# Altium PCB demo_dermis_main_testboard.PcbDoc (part 5 of 7)
Units mm, origin at the board's own origin, x right, y up, seen from the top; angles counter-clockwise.
Board outline 348.67 x 252.79 mm, 4 copper layers (Top Layer, Layer 1, Layer 2, Bottom Layer), stack 0.603 mm thick; 389 components, 231 nets, 2086 pads, 2626 vias.
Unrouted connection lines stored in the file: 34.
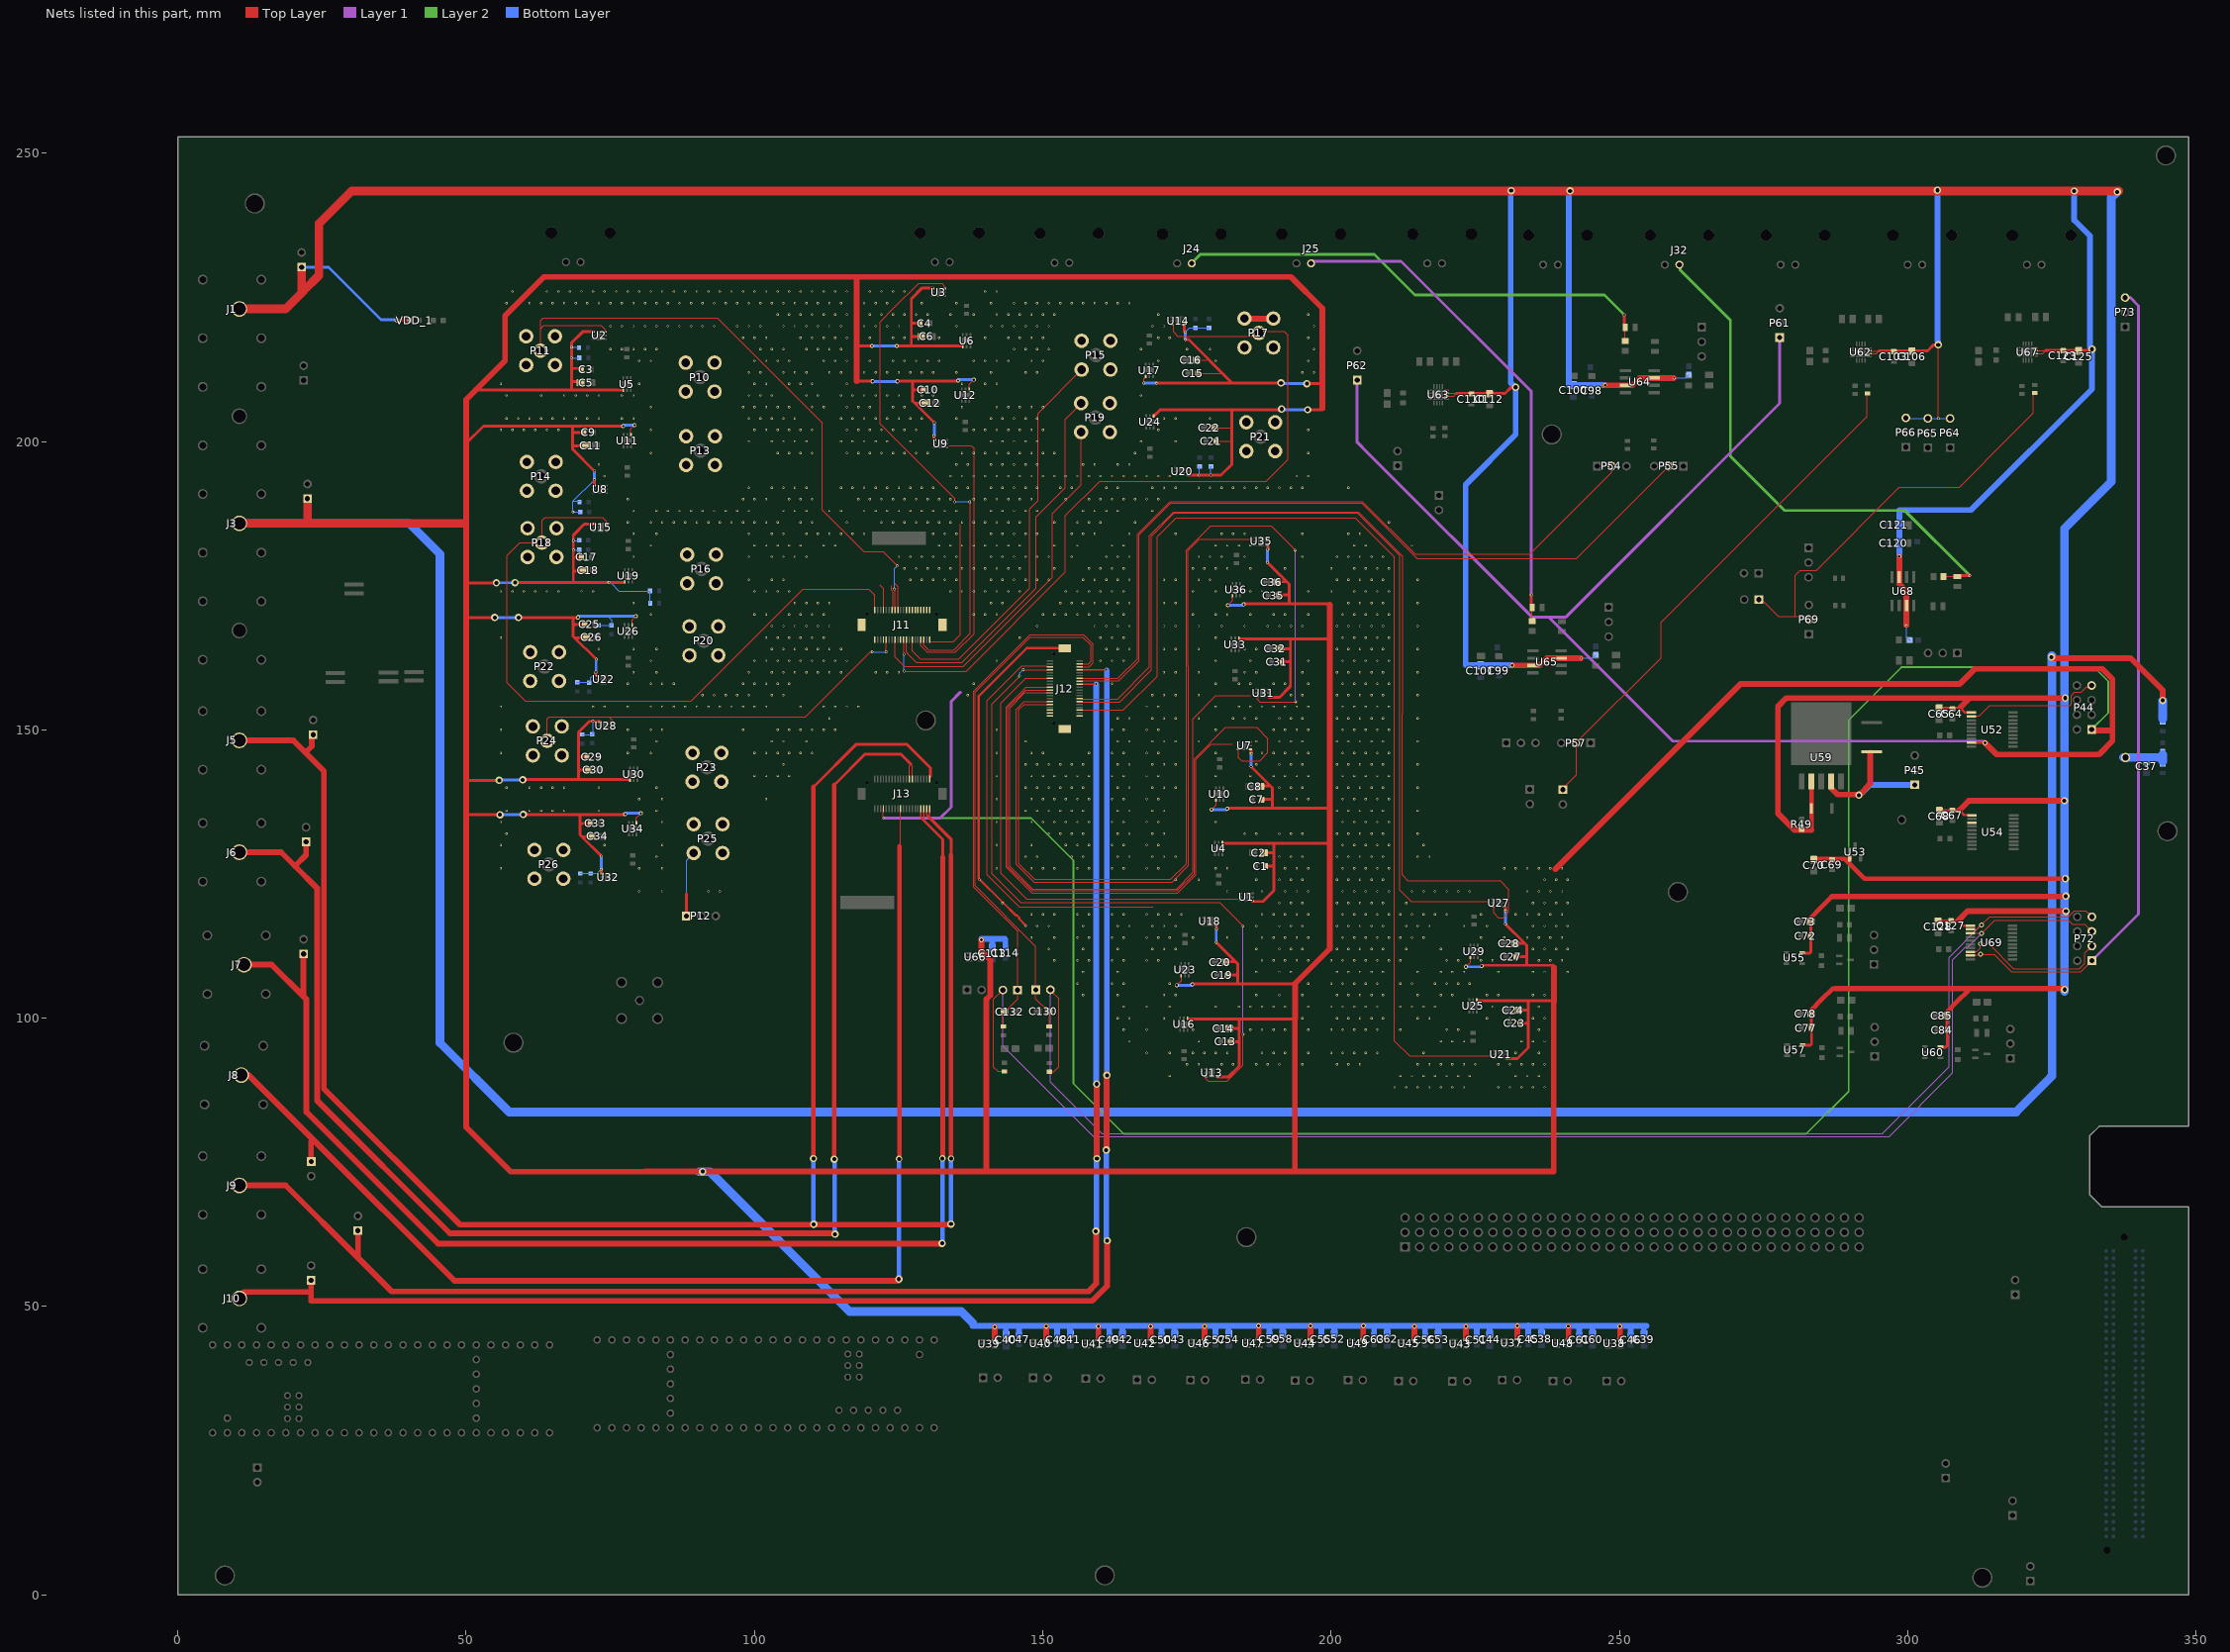
[diagram p6: the nets of this part, all layers, seen from the top]

## Via types
v1: diameter 0.4, hole 0.25, Top Layer to Bottom Layer, 1673 vias
v2: diameter 0.85, hole 0.5, Top Layer to Bottom Layer, 416 vias
v3: diameter 0.5, hole 0.3, Top Layer to Bottom Layer, 391 vias
v4: diameter 1.27, hole 0.711, Top Layer to Bottom Layer, 85 vias
v5: diameter 0.7, hole 0.4, Top Layer to Bottom Layer, 57 vias
v6: diameter 1.1, hole 0.7, Top Layer to Bottom Layer, 4 vias

## Nets (pads, with @x,y where several pads share a name; then routed paths per layer and width w, separated by ;. In a path a pad name is that pad's centre, name@x,y a point inside that pad or via, vN(x,y) a via of type N, cw(c..) or ccw(c..) an arc to the next point about the centre after c; other vN are vias at no path point) (continued)
VCM: J11.1 J11.2 J11.3 J11.5 J11.7 J11.8 J11.9 J11.11 J11.13 J11.14 J11.15 J11.17 J11.18 J11.22 J11.23 J11.26 J11.27 J11.33 J11.34 J11.40 J11.S1 J11.S2 J12.5 J12.13 J12.19 J12.23 J12.29 J12.30 J12.35 J12.36 J12.37 J12.39 J12.40 J12.S1 J12.S2 J13.34 P10.2 P11.2 P12.1 P13.2 P14.2 P15.2 P16.2 P17.2 P18.2 P19.2 P20.2 P21.2 P22.2 P23.2 P24.2 P25.2 P26.2 P44.1 P61.1 P62.1 U52.9 | length 1949.2
  Top Layer w0.1: 88.193,121.535 88.244,121.586
  Top Layer w0.15: 121.667,175.137 122.359,174.445 122.359,170.812 J11.33@122.346,170.799 ; 123.744,175.028 123.722,175.005 123.722,174.189 123.998,173.912 123.998,173.41 123.997,173.408 123.997,170.95 J11.27@123.846,170.799 ; 124.294,175.438 124.876,174.855 124.876,170.829 J11.23@124.846,170.799 ; J11.26@124.346,165.649 124.346,162.609 125.819,161.135 125.921,161.135 126.012,161.045 126.199,161.045 ; 126.2,161.044 136.244,161.044 151.63,176.43 151.63,187.504 156.63,192.504 P19.2@156.63,201.636 ; 140.315,124.873 140.315,155.088 146.291,161.065 150.7,161.065 J12.5@150.852,160.912 ; 140.324,124.873 145.926,119.271 169.085,119.271 ; J12.23@150.98,156.419 146.877,156.419 144.266,153.808 144.266,126.343 148.188,122.421 173.164,122.421 176.02,125.277 176.02,151.91 180.011,155.901 185.941,155.901 ; J12.29@151.205,154.914 146.745,154.914 145.398,153.568 145.398,126.682 148.463,123.617 172.41,123.617 175.196,126.403 175.196,161.105 175.196,181.049 177.166,183.018 186.428,183.018 ; J12.19@151.21,157.408 147.084,157.408 143.683,154.006 143.683,126.187 148.171,121.698 173.337,121.698 176.531,124.893 176.531,144.888 179.2,147.556 182.788,147.556 ; J12.13@151.411,158.92 147.033,158.92 142.769,154.657 142.769,125.133 147.205,120.697 183.836,120.697 ; J12.30@155.981,154.858 163.291,154.858 168.835,160.402 168.835,183.606 172.794,187.565 204.547,187.565 211.894,180.218 211.894,122.244 213.894,120.244 227.284,120.244 ; J12.36@156.647,153.458 163.962,153.458 169.815,159.311 169.815,183.455 173.121,186.76 204.172,186.76 210.983,179.949 210.983,96.043 213.581,93.445 227.947,93.445
  Top Layer w0.2: v1@122.335,134.657 122.335,136.247 J13.34@122.345,136.33 ; J11.18@126.345,165.649 126.345,163.489 126.52,163.314 126.52,163.208 128.058,161.67 135.949,161.67 148.836,174.556 148.836,186.919 153.896,191.978 153.896,203.811 156.63,206.545 P19.2@156.63,206.635 ; J11.14@127.346,165.649 127.345,163.69 128.716,162.32 129.411,162.32 129.419,162.311 135.454,162.311 147.71,174.567 147.71,188.292 149.128,189.711 149.128,196 149.128,204.873 P15.2@156.719,212.464 ; J11.8@128.845,165.649 128.845,164.579 129.957,163.468 134.866,163.468 138.108,166.71 138.108,198.755 137.596,199.267 133.748,199.267 133.723,199.293 ; J11.2@130.341,165.644 J11.2@130.346,165.649 ; J11.2@130.39,165.288 134.492,165.288 135.695,166.491 135.695,185.622
  Top Layer w0.4: v1@146.997,116.123 145.899,117.222 145.899,117.418 145.459,117.857 145.263,117.857 143.06,120.06 138.873,124.247 138.873,155.827 147.21,164.165 J12.S1@153.78,164.165 ; U52.9@311.36,147.791 v2@313.337,147.791
  Top Layer w0.5: P12.1@88.193,117.712 88.193,121.535
  Top Layer w1: P17.2@184.971,221.313 P17.2@189.971,221.313 ; 238.865,125.808 271.034,157.978 309.029,157.978 311.627,160.576 333.727,160.576 335.49,158.813 335.49,149.883 ; v2@313.337,147.791 315.391,145.737 333.145,145.737 335.49,148.081 335.49,149.883 ; P44.1@331.856,150.075 332.048,149.883 335.49,149.883
  Layer 1 w0.5: v1@122.463,134.691 132.183,134.691 134.094,136.602 134.094,154.914 135.705,156.524 ; P62.1@204.503,210.654 204.503,199.879 206.511,197.872 206.511,197.861 234.796,169.576 240.725,169.576 277.78,206.63 P61.1@277.78,218.025 ; 237.725,169.538 259.213,148.05 313.073,148.05 v2(313.376,147.747)
  Layer 2 w0.3: v1@122.333,134.706 147.955,134.706 154.83,127.83 155.293,127.368 155.293,88.675 164.021,79.947 282.363,79.947 289.719,87.303 289.719,151.696 298.896,160.874 332.313,160.874 334.748,158.439 334.748,152.967 P44.1@331.856,150.075
  Bottom Layer w0.15: P12.1@88.193,117.712 88.193,127.373 P25.2@89.456,128.636
  other v1: 211,88 213,88 215,88 217,88 219,88 221,88 223,88 229,88 231,88 233,88 235,88 237,88 172,90 212,90 214,90 216,90 218,90 220,90 222,90 224,90 232,90 234,90 236,90 175,92 177,92 181,92 183,92 187,92 189,92 191,92 195,92 201,92 203,92 205,92 215,92 217,92 219,92 221,92 223,92 225,92 229,92 231,92 233,92 235,92 237,92 168,94 172,94 176,94 178,94 180,94 182,94 188,94 190,94 192,94 196,94 200,94 202,94 204,94 206,94 208,94 216,94 232,94 236,94 165,96 177,96 219,96 221,96 223,96 233,96 235,96 237,96 164,98 168,98 176,98 186,98 188,98 190,98 192,98 196,98 200,98 202,98 204,98 206,98 208,98 212,98 220,98 222,98 236,98 163,100 165,100 171,100 195,100 201,100 203,100 205,100 207,100 209,100 215,100 217,100 227,100 231,100 235,100 237,100 164,102 168,102 172,102 180,102 184,102 186,102 188,102 190,102 192,102 196,102 200,102 202,102 204,102 206,102 208,102 212,102 214,102 216,102 218,102 228,102 236,102 157,104 163,104 171,104 173,104 187,104 191,104 195,104 201,104 203,104 205,104 207,104 209,104 215,104 219,104 221,104 227,104 229,104 235,104 237,104 156,106 162,106 164,106 172,106 196,106 200,106 202,106 204,106 206,106 208,106 212,106 214,106 218,106 220,106 222,106 224,106 157,108 163,108 173,108 187,108 191,108 193,108 201,108 203,108 205,108 207,108 209,108 215,108 219,108 221,108 223,108 229,108 235,108 237,108 241,108 152,110 156,110 158,110 162,110 164,110 168,110 170,110 188,110 190,110 192,110 194,110 196,110 200,110 202,110 204,110 206,110 208,110 210,110 212,110 220,110 222,110 226,110 228,110 236,110 238,110 240,110 151,112 157,112 163,112 169,112 171,112 173,112 187,112 191,112 193,112 195,112 201,112 203,112 205,112 207,112 209,112 213,112 219,112 223,112 235,112 237,112 239,112 241,112 148,114 152,114 156,114 158,114 162,114 164,114 168,114 170,114 172,114 176,114 182,114 188,114 190,114 192,114 194,114 196,114 202,114 204,114 206,114 208,114 210,114 212,114 214,114 216,114 226,114 230,114 234,114 236,114 238,114 240,114 147,116 149,116 151,116 157,116 163,116 165,116 169,116 171,116 173,116 187,116 191,116 193,116 195,116 201,116 203,116 205,116 207,116 209,116 213,116 215,116 217,116 223,116 227,116 235,116 237,116 239,116 241,116 148,118 150,118 152,118 156,118 158,118 162,118 164,118 168,118 170,118 172,118 174,118 188,118 190,118 192,118 194,118 196,118 202,118 204,118 206,118 208,118 210,118 212,118 214,118 216,118 218,118 220,118 226,118 232,118 234,118 236,118 238,118 240,118 143,120 191,120 193,120 195,120 201,120 203,120 205,120 207,120 209,120 213,120 235,120 237,120 239,120 241,120 80,122 84,122 92,122 94,122 182,122 188,122 192,122 194,122 196,122 202,122 204,122 206,122 208,122 210,122 214,122 216,122 218,122 220,122 222,122 224,122 234,122 236,122 238,122 240,122 139,124 173,124 177,124 187,124 191,124 193,124 195,124 201,124 203,124 205,124 207,124 209,124 237,124 239,124 241,124 56,126 80,126 84,126 142,126 148,126 150,126 152,126 156,126 158,126 162,126 164,126 168,126 170,126 180,126 182,126 192,126 194,126 196,126 202,126 204,126 206,126 208,126 210,126 230,126 232,126 234,126 236,126 238,126 240,126 83,128 147,128 149,128 155,128 157,128 163,128 165,128 169,128 171,128 173,128 191,128 193,128 195,128 201,128 203,128 205,128 207,128 209,128 215,128 217,128 56,130 74,130 84,130 142,130 148,130 154,130 156,130 158,130 162,130 164,130 168,130 170,130 202,130 204,130 206,130 208,130 210,130 216,130 57,132 151,132 153,132 155,132 157,132 163,132 165,132 169,132 171,132 185,132 187,132 191,132 193,132 195,132 201,132 203,132 205,132 207,132 209,132 215,132 56,134 84,134 142,134 148,134 150,134 152,134 154,134 156,134 158,134 162,134 164,134 168,134 170,134 180,134 202,134 204,134 206,134 208,134 210,134 122.333,134.657 57,136 61,136 63,136 65,136 67,136 73,136 83,136 147,136 149,136 151,136 153,136 155,136 157,136 163,136 165,136 169,136 171,136 201,136 203,136 205,136 207,136 209,136 215,136 80,138 84,138 102,138 142,138 148,138 150,138 152,138 154,138 156,138 158,138 162,138 164,138 168,138 170,138 192,138 194,138 196,138 202,138 204,138 206,138 208,138 210,138 57,140 61,140 63,140 65,140 67,140 73,140 83,140 147,140 149,140 151,140 153,140 155,140 157,140 163,140 165,140 169,140 171,140 173,140 191,140 193,140 195,140 201,140 203,140 205,140 207,140 209,140 215,140 100,142 102,142 104,142 106,142 142,142 148,142 150,142 152,142 154,142 156,142 158,142 162,142 164,142 168,142 170,142 180,142 186,142 190,142 192,142 194,142 196,142 202,142 204,142 206,142 208,142 210,142 105,144 147,144 149,144 151,144 153,144 155,144 157,144 163,144 165,144 169,144 171,144 173,144 187,144 191,144 193,144 195,144 201,144 203,144 205,144 207,144 209,144 215,144 56,146 78,146 82,146 100,146 102,146 104,146 106,146 108,146 110,146 142,146 148,146 150,146 158,146 162,146 164,146 168,146 170,146 180,146 188,146 190,146 192,146 194,146 196,146 202,146 204,146 206,146 208,146 210,146 83,148 103,148 105,148 109,148 147,148 163,148 165,148 169,148 171,148 173,148 177,148 187,148 191,148 193,148 195,148 201,148 203,148 205,148 207,148 209,148 215,148 56,150 78,150 82,150 84,150 98,150 104,150 106,150 108,150 110,150 112,150 114,150 142,150 162,150 164,150 168,150 170,150 180,150 190,150 192,150 194,150 196,150 202,150 204,150 206,150 208,150 210,150 113,152 163,152 165,152 169,152 171,152 173,152 177,152 183,152 185,152 187,152 191,152 193,152 195,152 201,152 203,152 205,152 207,152 209,152 215,152 56,154 72,154 74,154 78,154 82,154 84,154 86,154 88,154 90,154 92,154 94,154 96,154 98,154 100,154 102,154 108,154 112,154 114,154 116,154 118,154 168,154 170,154 180,154 184,154 186,154 188,154 190,154 192,154 194,154 196,154 202,154 204,154 206,154 208,154 210,154 91,156 93,156 95,156 97,156 99,156 103,156 105,156 137,156 169,156 171,156 173,156 177,156 193,156 195,156 201,156 203,156 205,156 207,156 209,156 215,156 78,158 82,158 84,158 86,158 98,158 100,158 102,158 104,158 106,158 138,158 162,158 180,158 184,158 186,158 190,158 192,158 196,158 202,158 204,158 206,158 208,158 210,158 79,160 83,160 99,160 103,160 105,160 107,160 109,160 111,160 113,160 115,160 121,160 123,160 125,160 171,160 173,160 177,160 185,160 187,160 195,160 201,160 203,160 205,160 207,160 209,160 215,160 82,162 100,162 102,162 104,162 106,162 108,162 110,162 112,162 114,162 116,162 142,162 160,162 162,162 164,162 180,162 186,162 196,162 202,162 204,162 206,162 208,162 210,162 73,164 79,164 83,164 103,164 105,164 107,164 109,164 111,164 113,164 115,164 161,164 163,164 165,164 171,164 173,164 177,164 185,164 187,164 201,164 203,164 205,164 207,164 209,164 215,164 56,166 102,166 104,166 106,166 108,166 110,166 112,166 146,166 160,166 162,166 164,166 180,166 202,166 204,166 206,166 208,166 210,166 103,168 105,168 107,168 109,168 111,168 113,168 149,168 159,168 161,168 163,168 165,168 171,168 173,168 177,168 181,168 185,168 189,168 191,168 193,168 195,168 201,168 203,168 205,168 207,168 209,168 215,168 82,170 100,170 102,170 106,170 108,170 110,170 112,170 138,170 140,170 142,170 150,170 152,170 154,170 156,170 158,170 160,170 162,170 164,170 176,170 180,170 182,170 186,170 190,170 192,170 196,170 202,170 204,170 206,170 208,170 210,170 79,172 107,172 109,172 111,172 113,172 141,172 143,172 153,172 155,172 157,172 159,172 161,172 163,172 165,172 171,172 173,172 203,172 205,172 207,172 209,172 215,172 56,174 58,174 60,174 62,174 64,174 66,174 70,174 72,174 100,174 102,174 104,174 106,174 134,174 136,174 138,174 140,174 142,174 144,174 146,174 154,174 156,174 158,174 160,174 162,174 164,174 176,174 180,174 186,174 188,174 196,174 200,174 204,174 206,174 208,174 210,174 99,176 103,176 105,176 127,176 129,176 131,176 133,176 135,176 141,176 143,176 145,176 147,176 149,176 151,176 157,176 159,176 161,176 163,176 165,176 171,176 173,176 177,176 179,176 201,176 203,176 205,176 207,176 209,176 215,176 126,178 128,178 130,178 132,178 134,178 136,178 138,178 140,178 142,178 144,178 146,178 152,178 158,178 160,178 162,178 164,178 176,178 178,178 180,178 182,178 186,178 192,178 200,178 204,178 206,178 208,178 210,178 79,180 99,180 103,180 105,180 107,180 109,180 125,180 127,180 129,180 131,180 133,180 135,180 141,180 143,180 145,180 147,180 149,180 151,180 155,180 161,180 163,180 165,180 177,180 179,180 181,180 185,180 195,180 201,180 203,180 205,180 207,180 209,180 82,182 100,182 102,182 104,182 106,182 108,182 112,182 114,182 132,182 134,182 136,182 138,182 140,182 142,182 144,182 146,182 152,182 156,182 162,182 164,182 180,182 182,182 184,182 186,182 204,182 206,182 214,182 79,184 83,184 99,184 103,184 105,184 109,184 111,184 113,184 115,184 117,184 119,184 131,184 133,184 135,184 141,184 143,184 145,184 147,184 149,184 155,184 157,184 159,184 165,184 173,184 181,184 183,184 185,184 195,184 203,184 205,184 78,186 82,186 84,186 86,186 88,186 90,186 92,186 94,186 96,186 98,186 100,186 102,186 104,186 108,186 110,186 116,186 122,186 124,186 126,186 128,186 130,186 132,186 134,186 136,186 138,186 140,186 142,186 144,186 146,186 152,186 156,186 158,186 160,186 166,186 210,186 79,188 83,188 85,188 87,188 89,188 91,188 93,188 95,188 97,188 99,188 105,188 107,188 109,188 113,188 115,188 119,188 121,188 123,188 125,188 127,188 129,188 131,188 133,188 135,188 141,188 143,188 145,188 147,188 149,188 157,188 159,188 161,188 163,188 169,188 78,190 98,190 100,190 102,190 106,190 108,190 110,190 118,190 120,190 122,190 124,190 126,190 128,190 130,190 132,190 134,190 138,190 140,190 142,190 144,190 146,190 148,190 154,190 158,190 160,190 162,190 164,190 166,190 168,190 170,190 99,192 103,192 105,192 107,192 109,192 115,192 117,192 119,192 121,192 123,192 125,192 127,192 129,192 131,192 135,192 137,192 141,192 143,192 145,192 147,192 149,192 153,192 155,192 161,192 163,192 169,192 171,192 173,192 177,192 179,192 181,192 183,192 185,192 187,192 189,192 191,192 193,192 195,192 203,192 74,194 134,194 136,194 138,194 140,194 142,194 144,194 146,194 148,194 150,194 152,194 154,194 156,194 158,194 160,194 162,194 164,194 166,194 168,194 170,194 172,194 194,194 196,194 73,196 135,196 137,196 141,196 143,196 145,196 147,196 149,196 157,196 159,196 163,196 165,196 82,198 104,198 106,198 108,198 110,198 116,198 118,198 120,198 122,198 124,198 126,198 128,198 130,198 136,198 138,198 140,198 142,198 144,198 146,198 148,198 150,198 152,198 166,198 196,198 99,200 103,200 105,200 107,200 109,200 115,200 117,200 119,200 121,200 123,200 127,200 141,200 143,200 145,200 147,200 149,200 167,200 173,200 56,202 58,202 60,202 62,202 64,202 66,202 82,202 100,202 102,202 104,202 106,202 108,202 110,202 116,202 118,202 120,202 122,202 124,202 126,202 128,202 138,202 140,202 142,202 144,202 146,202 148,202 150,202 170,202 196,202 57,204 59,204 61,204 63,204 65,204 67,204 69,204 71,204 73,204 77,204 79,204 99,204 101,204 103,204 105,204 107,204 115,204 117,204 119,204 121,204 123,204 125,204 127,204 129,204 135,204 141,204 143,204 145,204 147,204 149,204 171,204 173,204 179,204 82,206 98,206 100,206 102,206 104,206 106,206 110,206 112,206 116,206 118,206 120,206 124,206 126,206 136,206 142,206 144,206 146,206 148,206 150,206 57,208 63,208 67,208 69,208 71,208 73,208 77,208 79,208 99,208 101,208 103,208 109,208 111,208 115,208 117,208 119,208 121,208 123,208 125,208 129,208 131,208 167,208 56,210 80,210 100,210 102,210 106,210 108,210 110,210 116,210 136,210 140,210 142,210 99,212 101,212 105,212 107,212 109,212 113,212 115,212 119,212 121,212 123,212 125,212 127,212 129,212 131,212 135,212 141,212 147,212 149,212 195,212 197,212 80,214 82,214 100,214 102,214 104,214 106,214 112,214 114,214 116,214 120,214 124,214 126,214 128,214 130,214 132,214 138,214 140,214 142,214 144,214 148,214 150,214 170,214 180,214 196,214 75,216 77,216 79,216 81,216 83,216 101,216 103,216 105,216 109,216 111,216 113,216 115,216 145,216 147,216 149,216 151,216 167,216 175,216 179,216 197,216 98,218 100,218 102,218 108,218 110,218 112,218 114,218 116,218 120,218 124,218 126,218 132,218 140,218 144,218 146,218 148,218 150,218 170,218 172,218 196,218 75,220 77,220 79,220 81,220 83,220 85,220 87,220 89,220 91,220 93,220 97,220 99,220 101,220 105,220 107,220 109,220 111,220 113,220 115,220 119,220 121,220 123,220 125,220 135,220 141,220 143,220 145,220 147,220 149,220 151,220 169,220 171,220 197,220 104,222 106,222 108,222 110,222 112,222 114,222 116,222 120,222 122,222 124,222 126,222 128,222 130,222 134,222 138,222 142,222 144,222 146,222 148,222 150,222 152,222 170,222 196,222 57,224 61,224 63,224 65,224 67,224 69,224 71,224 73,224 75,224 77,224 79,224 81,224 83,224 85,224 87,224 89,224 91,224 93,224 95,224 97,224 99,224 101,224 103,224 105,224 107,224 109,224 111,224 113,224 115,224 119,224 121,224 123,224 129,224 135,224 141,224 145,224 147,224 149,224 151,224 153,224 155,224 157,224 159,224 161,224 163,224 165,224 58,226 64,226 66,226 68,226 70,226 72,226 74,226 76,226 78,226 80,226 82,226 84,226 86,226 88,226 90,226 92,226 94,226 96,226 98,226 100,226 102,226 104,226 106,226 108,226 110,226 112,226 114,226 116,226 120,226 122,226 124,226 126,226 140,226 142,226
VCM_COMP: U54.3 | length 0.1
  Top Layer w0.15: U54.3@311.094,133.901 U54.3@311.152,133.958
VCM_INAMP: P72.1 P73.3 U69.9 | length 143.1
  Top Layer w0.2: U69.9@310.879,110.847 310.994,110.963 312.496,110.963 v2(312.619,111.086) 314.977,111.086 317.999,108.064 330.005,108.064 P72.1@331.907,109.966
  Layer 1 w0.5: P72.1@331.907,109.966 340.006,118.065 340.006,223.537 338.59,224.954 P73.3@337.679,224.954
  Bottom Layer w1: P72.1@331.907,109.966 P72.1@331.958,109.916
VDAC_RESERVED0: P44.7 U52.2 | length 23.7
  Top Layer w0.2: U52.2@311.278,152.385 312.364,152.385 314.184,154.205 328.062,154.205 328.316,154.459 328.316,155.966 328.877,156.528 330.074,156.528 331.028,157.482 331.643,157.482 P44.7@331.856,157.695
VDAC_RESERVED1: P72.3 U69.8 | length 26.5
  Top Layer w0.2: U69.8@310.879,111.497 310.99,111.609 311.999,111.609 312.584,112.194 v2(312.584,112.901) 314.005,112.901 318.356,108.55 329.734,108.55 330.69,109.506 330.69,111.288 P72.3@331.907,112.506
VDD_2P5V: C83.1 P45.1 U59.4 | length 25.4
  Top Layer w0.2: U59.4@286.531,140.273 U59.4@286.531,141.851
  Top Layer w1: U59.4@286.726,139.858 287.781,138.803 291.505,138.745 291.751,138.741 293.465,140.675 C83.1@293.465,146.069
  Bottom Layer w1: v4@291.568,138.609 293.428,140.47 P45.1@301.195,140.47
  other v4: 291.504,138.673
VDD_3P3V_IN: C1.1 C2.1 C3.1 C4.1 C5.1 C6.1 C7.1 C8.1 C9.1 C10.1 C11.1 C12.1 C13.1 C14.1 C15.1 C16.1 C17.1 C18.1 C19.1 C20.1 C21.1 C22.1 C23.1 C24.1 C25.1 C26.1 C27.1 C28.1 C29.1 C30.1 C31.1 C32.1 C33.1 C34.1 C35.1 C36.1 C38.1 C39.1 C40.1 C41.1 C42.1 C43.1 C44.1 C45.1 C46.1 C47.1 C48.1 C49.1 C50.1 C51.1 C52.1 C53.1 C54.1 C55.1 C56.1 C57.1 C58.1 C59.1 C60.1 C61.1 C62.1 C63.1 C113.1 C114.1 J3.1 P3.1 R24.1 R25.1 R26.1 R27.1 R28.2 R29.1 R30.1 R31.1 R32.1 R35.1 R36.1 R37.1 R38.1 R39.1 R40.1 R41.1 R42.1 R43.1 R44.1 R45.1 R46.1 U1.4 U2.4 U3.4 U4.4 U5.4 U6.4 U7.4 U8.4 U9.4 U10.4 U11.4 U12.4 U13.4 U14.4 U15.4 U16.4 U17.4 U18.4 U19.4 U20.4 U21.4 U22.4 U23.4 U24.4 U25.4 U26.4 U27.4 U28.4 U29.4 U30.4 U31.4 U32.4 U33.4 U34.4 U35.4 U36.4 U37.5@232.354,44.312 U38.5@250.13,44.222 U39.5@141.672,44.181 U40.5@150.628,44.248 U41.5@159.681,44.194 U42.5@168.741,44.243 U43.5@223.39,44.203 U44.5@196.444,44.283 U45.5@214.461,44.232 U46.5@178.11,44.243 U47.5@187.483,44.288 U48.5@241.201,44.251 U49.5@205.614,44.293 U66.5@139.318,111.267 | length 2267
  Top Layer w0.1: 193.717,99.874 193.717,99.928 193.729,99.939 ; 193.729,105.889 193.74,105.9
  Top Layer w0.15: 68.299,210.392 68.318,210.373 ; 68.63,199.243 68.649,199.224 ; C16.1@176.655,214.099 176.687,214.132 178.677,214.132 ; C15.1@176.884,211.804 180.969,211.804 ; C22.1@179.792,202.337 179.824,202.37 182.799,202.37 ; C21.1@180.021,200.042 182.783,200.042 182.799,200.024
  Top Layer w0.2: U8.4@72.134,192.454 U8.4@72.22,192.368 ; U11.4@78.571,201.152 78.571,202.188 v5(79.217,202.833) ; U26.4@78.76,168.034 78.76,169.07 v5(79.405,169.715) ; U34.4@79.501,134.009 79.501,134.723 v5(80.307,135.529) ; U12.4@137.216,209.184 137.216,209.897 v5(138.022,210.703) ; v3(167.532,210.123) 167.532,210.876 167.819,211.163 U17.4@167.819,211.316 ; v5(173.207,105.724) 174.013,106.53 U23.4@174.013,107.243 ; v5(179.244,136.183) 180.05,136.989 U10.4@180.05,137.702 ; v5(182.105,171.597) 182.911,172.403 U36.4@182.911,173.116 ; v5(223.345,108.909) 224.151,109.715 U29.4@224.151,110.428
  Top Layer w0.5: 49.989,135.282 v4(55.856,135.283) ; 49.989,141.241 v4(55.743,141.242) ; 49.989,169.466 49.992,169.468 v4(54.952,169.47) ; 49.989,199.69 52.985,202.686 68.483,202.686 ; 50.294,175.49 v4(55.236,175.49) ; 51.656,208.934 68.299,208.934 ; v4(58.477,175.53) 58.511,175.564 68.58,175.564 ; v4(59.073,169.468) v5@69.407,169.468 ; v4@59.485,141.378 69.483,141.378 ; v4@59.976,135.282 v5@77.517,135.282 ; 68.318,210.373 C5.1@69.88,210.373 ; 68.394,212.668 C3.1@69.65,212.668 ; 68.563,169.27 68.563,166.219 v3(72.55,162.231) ; 68.632,179.817 C17.1@70.112,179.817 ; 68.649,199.224 C11.1@70.211,199.224 ; 68.692,168.242 C25.1@70.181,168.242 ; 68.725,201.519 C9.1@69.982,201.519 ; 68.779,177.521 C18.1@70.341,177.521 ; 68.849,165.946 C26.1@70.41,165.946 ; 69.626,143.044 C30.1@71.188,143.044 ; 69.702,145.339 C29.1@70.959,145.339 ; 69.717,135.146 69.717,131.834 70.105,131.446 ; 69.757,133.742 C33.1@71.195,133.742 ; C34.1@71.424,131.446 70.105,131.446 ; U2.4@72.034,219.027 70.198,219.027 68.299,217.128 68.299,216.362 68.299,210.392 68.299,208.934 ; U8.4@72.134,192.454 72.223,192.542 v3(72.223,193.372) ; v3@72.235,194.863 68.483,198.614 68.483,202.686 ; U15.4@72.283,185.749 72.315,185.657 70.479,185.657 68.58,183.758 v3(68.58,182.833) 68.58,175.564 ; U22.4@72.504,159.497 v3(72.504,160.002) ; U28.4@73.21,151.37 73.218,151.471 71.382,151.471 69.483,149.572 69.483,141.378 ; U32.4@73.407,125.213 v3(73.407,125.815) ; v3(73.458,128.093) 70.105,131.446 ; 77.067,208.934 68.299,208.934 ; v5(77.228,202.674) 68.495,202.674 68.483,202.686 ; U19.4@77.348,175.564 68.58,175.564 ; 78.252,141.378 69.483,141.378 ; 117.707,210.457 v5@120.486,210.457 ; 117.707,216.552 v5@120.08,216.552 ; v5@124.825,216.552 127.197,216.552 ; v5@124.85,210.457 v5@135.231,210.457 ; 127.341,218.218 C6.1@128.902,218.218 ; 127.417,220.514 C4.1@128.673,220.514 ; 127.431,210.321 127.431,207.008 127.819,206.621 ; 127.471,208.916 C10.1@128.909,208.916 ; C12.1@129.139,206.621 127.819,206.621 ; U3.4@130.924,226.545 130.932,226.646 129.096,226.646 127.197,224.747 127.197,216.552 ; U9.4@131.121,200.388 v3(131.121,200.99) ; v3(131.172,203.268) 127.819,206.621 ; 135.966,216.552 127.197,216.552 ; U24.4@169.22,204.416 169.263,204.416 170.356,205.509 ; v3(169.684,210.104) v4@191.3,210.104 ; 170.488,205.509 v4@191.409,205.509 ; U14.4@174.506,220.25 174.506,219.08 v3(174.655,218.931) ; v3(174.668,217.664) 175.283,217.664 182.714,210.234 ; U20.4@175.151,194.182 180.9,194.182 182.799,196.08 182.799,200.024 182.799,202.37 182.799,205.279 ; 175.263,99.874 184.031,99.874 ; v5@175.997,105.97 183.797,105.97 188.478,105.97 193.67,105.97 193.74,105.9 ; v3(180.057,113.159) 183.41,109.806 ; v3(180.107,115.437) U18.4@180.107,116.039 ; U13.4@180.304,89.882 180.296,89.781 182.132,89.781 184.031,91.68 184.031,96.878 184.013,96.896 184.013,97.476 184.031,97.495 184.031,99.874 ; 181.3,130.334 190.069,130.334 ; v5@182.035,136.429 189.835,136.429 199.576,136.429 ; C20.1@182.09,109.806 183.41,109.806 ; C19.1@182.319,107.511 183.757,107.511 ; C14.1@182.326,98.209 183.836,98.209 ; C13.1@182.556,95.913 183.812,95.913 ; 183.797,106.106 183.797,109.419 183.41,109.806 ; 184.161,165.748 192.929,165.748 ; v5@184.895,171.843 199.574,171.843 ; v3(186.094,143.619) 189.447,140.266 ; v3(186.145,145.896) U7.4@186.145,146.499 ; U1.4@186.341,120.342 186.333,120.241 188.17,120.241 190.069,122.14 190.069,130.334 ; C8.1@188.127,140.266 189.447,140.266 ; C7.1@188.357,137.97 189.795,137.97 ; C2.1@188.364,128.668 189.925,128.668 ; C1.1@188.593,126.373 189.849,126.373 ; v3(188.955,179.032) 192.308,175.679 ; v3(189.005,181.31) U35.4@189.005,181.912 ; U31.4@189.202,155.755 189.194,155.654 191.03,155.654 192.929,157.553 192.929,165.748 ; 189.835,136.566 189.835,139.878 189.447,140.266 ; C36.1@190.988,175.679 192.308,175.679 ; C35.1@191.217,173.384 192.655,173.384 ; C32.1@191.224,164.082 192.786,164.082 ; C31.1@191.454,161.786 192.71,161.786 ; 192.695,171.979 192.695,175.292 192.308,175.679 ; 193.717,99.874 184.031,99.874 ; v4(195.797,210.031) 198.185,210.031 ; v4(195.907,205.508) 198.295,205.508 ; 199.721,165.748 192.929,165.748 ; 199.755,130.334 190.069,130.334 ; 225.4,103.059 234.169,103.059 ; v5@226.135,109.155 233.935,109.169 238.474,109.177 ; v3(230.194,116.344) 233.547,112.991 ; v3(230.245,118.622) U27.4@230.245,119.224 ; U21.4@230.434,92.966 232.27,92.966 234.169,94.865 234.169,103.059 ; C28.1@232.228,112.991 233.547,112.991 ; C27.1@232.457,110.696 233.895,110.696 ; C24.1@232.464,101.394 234.026,101.394 ; C23.1@232.693,99.098 233.95,99.098 ; 233.935,109.291 233.935,112.604 233.547,112.991 ; 238.615,103.059 234.169,103.059
  Top Layer w1: 49.989,185.549 49.989,169.466 49.989,141.241 49.989,135.282 49.989,81.114 57.725,73.379 78.919,73.379 80.977,73.404 140.143,73.404 ; 49.989,186.038 49.989,199.69 49.989,207.267 51.656,208.934 56.729,214.007 56.729,221.805 63.468,228.544 193.026,228.544 198.479,223.091 198.479,205.711 ; 117.707,210.457 117.707,216.552 117.707,228.395 ; v2@139.318,113.593 139.318,111.66 140.902,110.076 140.902,103.984 140.222,103.304 140.222,73.483 140.143,73.404 ; 141.672,44.575 v2@141.672,46.507 ; 150.577,44.665 v2(150.576,46.599) ; 159.63,44.611 v2@159.63,46.544 ; 168.69,44.661 v2(168.689,46.595) ; 178.059,44.661 v2(178.058,46.595) ; 187.432,44.706 v2(187.431,46.64) ; 193.67,105.97 199.755,112.054 199.755,130.334 199.755,136.429 199.755,171.674 ; 193.717,99.874 193.717,73.412 193.709,73.404 ; 193.729,99.939 193.729,105.889 ; 196.393,44.7 v2@196.393,46.633 ; 205.562,44.711 v2(205.562,46.645) ; 214.41,44.65 v2(214.409,46.583) ; 223.339,44.62 v2@223.339,46.553 ; 232.303,44.73 v2@232.303,46.662 ; 238.604,102.793 238.604,73.404 193.709,73.404 ; 238.615,102.857 238.615,103.059 238.615,108.808 ; 241.15,44.669 v2(241.149,46.602) ; 250.079,44.639 v2@250.079,46.572 ; v4@325.017,162.443 338.626,162.443 344.191,156.878 v4(344.191,155.102) ; 140.143,73.404 193.709,73.404
  Top Layer w1.5: J3.1@10.67,185.809 22.476,185.809 ; P3.1@22.476,190.095 22.476,185.809 ; 49.729,185.809 22.476,185.809
  Bottom Layer w0.15: v3(68.251,214.497) 69.463,214.497 R24.1@69.484,214.518 ; v3(68.26,216.362) R25.1@69.439,216.362 ; 68.514,189.639 v3(68.514,187.783) R26.1@69.725,187.783 ; v3(68.58,182.833) 69.545,182.833 R30.1@69.628,182.916 ; v3(68.619,181.191) 69.601,181.191 R29.1@69.615,181.205 ; R31.1@69.064,158.243 71.206,158.243 71.232,158.216 71.255,158.216 71.557,158.519 71.557,159.055 v3(72.504,160.002) ; R27.1@69.701,189.647 68.522,189.647 v3@72.243,193.368 ; R37.1@69.806,125.09 72.682,125.09 v3(73.407,125.815) ; R35.1@70.132,149.199 71.823,149.199 R36.1@71.847,149.224 71.977,149.354 v3(71.977,151.489) ; R43.1@72.904,168.116 72.948,168.159 R44.1@75.211,168.159 75.233,168.159 75.233,169.021 74.753,169.501 ; v3(74.74,175.592) 74.999,175.592 76.512,174.079 R46.1@81.917,174.079 81.92,174.076 R45.1@81.92,171.945 ; v3(174.655,218.931) 175.396,219.673 R40.1@176.478,219.673 176.487,219.682 R39.1@178.83,219.682 ; v3(177.13,194.16) 177.13,195.637 R42.1@177.175,195.682 ; v3(179.142,194.185) 179.142,195.658 R41.1@179.167,195.683 ; R28.2@344.172,151.271 344.172,151.954
  Bottom Layer w0.2: v4(54.952,169.47) v4(54.952,169.47) ; v4(55.236,175.49) v4@55.255,175.51 ; v4@58.457,175.51 v4(58.477,175.53) ; v3@72.243,194.782 v3(72.243,194.925)
  Bottom Layer w0.5: v4(54.952,169.47) v4(59.073,169.468) ; v4@55.255,175.51 v4@58.457,175.51 ; v4@55.554,141.324 v4(59.797,141.324) ; v4@55.856,135.282 v4@60.199,135.282 ; v5@69.407,169.715 v5(79.405,169.715) ; v3@72.243,193.392 v3@72.243,194.782 ; v3@72.525,160.022 v3@72.525,162.292 ; v3@73.458,125.821 v3(73.458,128.093) ; v5@77.303,202.833 v5(79.217,202.833) ; v5@77.663,135.529 v5(80.307,135.529) ; v5@120.683,210.391 v5@124.613,210.391 ; 120.738,216.573 v5@124.668,216.573 ; v3@131.172,200.996 v3(131.172,203.268) ; v5@135.378,210.703 v5(138.022,210.703) ; v3(167.532,210.123) 167.55,210.104 v3(169.684,210.104) ; v5(173.207,105.724) v5@175.851,105.724 ; v3(174.668,217.664) v3@174.668,218.931 ; v5(179.244,136.183) v5@181.888,136.183 ; v3(180.057,113.159) v3@180.057,115.431 ; v5(182.105,171.597) v5@184.749,171.597 ; v3(186.094,143.619) v3@186.094,145.891 ; v3(188.955,179.032) v3@188.955,181.304 ; v4@191.51,210.051 v4@195.777,210.051 ; v4@191.619,205.528 v4@195.887,205.528 ; v5(223.345,108.909) v5@225.988,108.909 ; v3(230.194,116.344) v3@230.194,118.616
  Bottom Layer w1: 137.817,46.655 v2@141.672,46.655 ; v2@139.317,113.741 141.197,113.741 ; C113.1@141.246,112.111 C113.1@141.246,112.211 141.246,113.692 141.197,113.741 ; 143.425,113.741 141.197,113.741 ; 143.505,113.661 143.505,112.08 143.521,112.145 C114.1@143.535,112.203 ; C40.1@143.6,45.025 C40.1@143.6,45.125 143.6,46.606 143.551,46.655 ; 145.86,46.576 145.86,44.995 C47.1@145.889,45.118 ; C48.1@152.458,45.069 152.458,46.65 ; C41.1@154.717,45.039 154.717,46.62 ; C49.1@161.512,45.015 161.512,46.596 ; C42.1@163.77,44.985 163.77,46.566 ; C50.1@170.571,45.065 170.571,46.646 ; C43.1@172.83,45.034 172.83,46.615 ; C57.1@179.94,45.065 179.94,46.646 ; C54.1@182.2,45.034 182.2,46.615 ; C59.1@189.313,45.11 189.313,46.656 ; 189.313,46.691 189.313,46.656 ; C58.1@191.572,45.08 191.572,46.656 ; 191.572,46.661 191.572,46.656 ; C55.1@198.275,45.104 198.275,46.656 ; 198.275,46.685 198.275,46.656 ; C52.1@200.533,45.074 200.533,46.655 ; C63.1@207.443,45.115 207.443,46.656 ; 207.443,46.696 207.443,46.656 ; C62.1@209.703,45.084 209.703,46.656 ; 209.703,46.665 209.703,46.656 ; C56.1@216.291,45.054 216.291,46.635 ; C53.1@218.55,45.023 218.55,46.605 ; 225.015,46.674 234.184,46.674 ; C51.1@225.22,45.024 225.22,46.605 ; C44.1@227.479,44.994 227.479,46.575 ; 227.94,46.656 209.703,46.656 ; C45.1@234.184,45.134 234.184,46.674 ; 234.184,46.715 234.184,46.674 ; C38.1@236.443,45.103 236.443,46.674 ; 236.443,46.684 236.443,46.674 ; C61.1@243.031,45.073 243.031,46.654 ; C60.1@245.29,45.042 245.29,46.623 ; C46.1@251.96,45.043 251.96,46.624 ; C39.1@254.219,45.013 254.219,46.594 ; 254.68,46.674 236.443,46.674 ; v2@141.672,46.656 143.551,46.656 ; v2@141.672,46.655 143.551,46.655 ; 143.551,46.656 156.672,46.656 ; 143.551,46.655 145.86,46.655 150.576,46.656 152.458,46.656 154.717,46.656 156.672,46.656 ; 156.672,46.656 168.689,46.656 189.313,46.656 ; 189.313,46.656 191.572,46.656 ; 191.572,46.656 198.275,46.656 ; 198.275,46.656 207.443,46.656 ; 207.443,46.656 209.703,46.656 ; 234.184,46.674 236.443,46.674
  Bottom Layer w1.5: J3.1@10.67,185.809 40.136,185.809 45.442,180.504 45.442,95.742 57.44,83.743 318.555,83.743 ; v4@90.418,73.379 92.286,73.379 116.469,49.131 135.846,49.131 137.817,47.16 ; 318.788,83.743 324.805,89.76 324.805,89.805 325.003,90.002 325.003,160.506 ; 324.975,160.77 v4@324.975,162.877 ; 344.172,151.954 344.191,151.974 v4(344.191,155.102)
  other v2: 141.672,46.508 159.63,46.545 223.338,46.554 250.078,46.573 196.393,46.634 232.302,46.663 139.317,113.594
  other v4: 91.005,73.396 59.885,135.323 324.904,162.621 191.409,205.64 191.3,210.162
  other v5: 175.931,105.87 226.069,109.055 77.583,135.382 181.968,136.33 69.407,169.501 184.829,171.744 120.486,210.429 124.772,210.429 135.297,210.556 120.366,216.561 124.652,216.561
VDD_5V_IN: C64.1 C65.1 C67.1 C68.1 C69.1 C70.1 C72.1 C73.1 C77.1 C78.1 C82.1 C84.1 C85.1 C98.1 C99.1 C100.1 C101.1 C103.1 C106.1 C108.1 C109.1 C110.1 C112.1 C120.1 C121.1 C123.1 C125.1 C126.1 C127.1 C128.1 J1.1 P1.1 P64.3 P65.3 P66.3 R49.2 U52.1 U53.1 U54.1 U55.5 U57.5 U59.2 U60.5 U62.6 U62.7 U63.6 U63.7 U64.3@251.069,209.751 U64.7@255.996,211.021 U65.3@234.952,161.167 U65.7@239.879,162.437 U67.6 U67.7 U68.3@298.504,176.491 U68.7@299.774,171.563 U69.1 VDD_1.A | length 1179
  Top Layer w0.15: C128.1@305.079,117.057 C128.1@305.239,117.057 ; C128.1@305.254,117.042 C128.1@305.239,117.057 ; C68.1@305.294,136.21 C68.1@305.455,136.21 ; C128.1@305.379,117.042 305.264,117.054 C128.1@305.239,117.057 ; C68.1@305.469,136.196 C68.1@305.455,136.21 ; C68.1@305.479,136.208 C68.1@305.455,136.21 ; C68.1@305.479,136.208 C68.1@305.595,136.196
  Top Layer w0.2: U63.6@220.005,207.853 221.239,207.853 221.722,208.337 220.021,208.337 U63.7@220.005,208.353 ; v5(231.375,161.177) v5@231.38,161.172 ; 240.883,162.434 240.886,162.431 v3(243.388,162.431) ; v5(247.492,209.761) v5@247.496,209.756 ; 257,211.018 257.003,211.015 v3(259.505,211.015) ; C72.1@283.168,114.576 C72.1@283.195,114.549 ; C77.1@283.269,98.625 C77.1@283.296,98.598 ; U62.6@293.281,215.224 294.515,215.224 294.999,215.708 293.298,215.708 U62.7@293.281,215.725 ; v5@298.509,180.063 v5(298.514,180.068) ; v3(299.767,168.054) 299.767,170.557 299.77,170.56 ; v3@305.263,204.176 v4(305.263,216.771) ; C84.1@306.799,98.291 C84.1@306.826,98.264 ; U67.6@322.177,215.283 323.411,215.283 323.895,215.767 322.193,215.767 U67.7@322.177,215.784
  Top Layer w0.4: C70.1@283.718,127.474 C70.1@283.845,127.601 ; C128.1@305.237,116.804 305.254,116.897 308.704,116.897 309.554,116.047 U69.1@310.879,116.047 ; C68.1@305.453,135.957 305.469,136.051 308.92,136.051 309.77,135.201 U54.1@311.094,135.201 ; C65.1@305.619,153.851 309.07,153.851 309.92,153.001 U52.1@311.244,153.001
  Top Layer w0.5: v2(37.96,221.061) VDD_1.A@40.111,221.061 ; 221.722,208.337 230.145,208.337 231.208,209.4 v4(231.986,209.4) ; U55.5@281.929,111.247 282.963,111.247 283.195,111.48 C72.1@283.195,114.549 ; U57.5@282.03,95.296 283.064,95.296 283.296,95.529 C77.1@283.296,98.598 ; C72.1@283.168,114.576 C73.1@283.168,116.962 ; C77.1@283.269,98.625 C78.1@283.269,101.011 ; 294.999,215.708 303.422,215.708 304.484,216.771 v4(305.263,216.771) ; U60.5@305.665,95.02 305.56,94.962 306.594,94.962 306.826,95.195 C84.1@306.826,98.264 ; C84.1@306.799,98.291 C85.1@306.799,100.677 ; 323.895,215.767 v4@332.317,215.767
  Top Layer w0.8: C73.1@283.168,116.962 283.168,117.42 284.923,119.174 286.853,121.103 ; C78.1@283.269,101.011 283.269,101.468 285.024,103.223 286.954,105.152 ; 283.28,132.617 U59.2@283.28,141.057 ; C70.1@283.845,127.601 289.088,127.601 292.494,124.195 v4(327.295,124.195) ; 289.451,127.326 U53.1@289.888,127.755 ; C85.1@306.799,100.677 306.799,101.135 308.554,102.889 310.484,104.818
  Top Layer w1: v5@231.38,161.172 236.146,161.172 237.389,162.415 v3@243.303,162.415 ; v5@247.496,209.756 252.262,209.756 253.506,210.999 v3@259.42,210.999 ; 283.28,132.617 280.343,132.617 277.451,135.509 277.451,154.058 278.895,155.501 310.72,155.501 ; 286.853,121.103 326.618,121.103 326.683,121.169 v4(327.387,121.169) ; 287.406,105.128 v4@327.172,105.128 ; v5@298.509,180.063 298.509,175.297 299.752,174.054 v3@299.752,168.139 ; 308.704,116.897 310.354,118.548 v4@326.915,118.548 ; 308.92,136.051 310.57,137.701 v4(327.131,137.701) ; 309.07,153.851 310.72,155.501 ; v4(327.281,155.501) 310.72,155.501
  Top Layer w1.5: J1.1@10.569,223.088 10.569,223.005 18.697,223.005 21.449,225.758 P1.1@21.449,230.238 ; 21.777,226.086 24.488,228.797 24.488,237.78 30.174,243.464 30.204,243.434 ; 30.342,243.434 182.996,243.434 231.211,243.434 241.412,243.434 305.125,243.434 328.852,243.434 v4@336.164,243.434 ; v4(336.312,243.286) v4@336.164,243.434 ; v4@336.608,243.434 v4@336.164,243.434
  Bottom Layer w0.15: v2@37.898,221.122 v2(37.96,221.061)
  Bottom Layer w0.2: v3(243.388,162.431) 243.407,162.449 245.389,162.449 245.92,162.98 C109.1@245.92,163.008 ; v3(259.505,211.015) 259.524,211.033 261.506,211.033 262.037,211.564 C108.1@262.037,211.592 ; P66.3@299.139,204.002 P65.3@303.467,204.002 P64.3@307.796,204.002 ; v3(299.767,168.054) 299.786,168.036 299.786,166.054 300.317,165.523 C126.1@300.344,165.523
  Bottom Layer w0.5: P1.1@21.449,230.238 26.123,230.238 35.238,221.122 v2@37.898,221.122
  Bottom Layer w1: C101.1@225.535,161.193 v5@231.337,161.193 ; C101.1@225.901,161.222 223.345,161.222 223.313,161.253 223.313,192.518 231.986,201.191 v4(231.986,209.4) ; v4@231.111,243.5 231.111,210.159 231.154,210.159 231.913,209.4 v4(231.986,209.4) ; v4@231.935,209.451 v4(231.986,209.4) ; v4@231.986,209.429 v4(231.986,209.4) ; v4@241.227,243.447 241.227,209.806 C100.1@242.018,209.806 ; C100.1@241.652,209.777 v5@247.454,209.777 ; v5@298.529,180.106 298.529,185.541 C121.1@298.529,185.907 ; C121.1@298.558,185.541 298.558,188.098 298.59,188.129 310.953,188.129 331.942,209.118 v4(331.942,216.017) 331.561,216.398 331.561,235.662 328.852,238.371 v4(328.852,243.428) ; v4@305.125,243.612 v4(305.125,243.563) 305.125,217.411 305.211,217.324 305.211,216.823 v4(305.263,216.771)
  Bottom Layer w1.5: v4@327.156,104.675 327.156,104.974 327.156,155.501 327.156,184.291 327.156,184.89 335.27,193.004 335.27,242.244 v4(336.312,243.286)
  other v3: 305.329,203.999
  other v4: 327.185,104.974 327.415,118.548 241.412,243.447 231.211,243.5
VDD_COMP: J10.1 J12.8 P9.1 | length 266.8
  Top Layer w0.25: J12.8@156.355,160.42 v3@160.978,160.42
  Top Layer w1: J10.1@10.674,51.398 J10.1@11.472,52.196 ; 11.472,52.521 23.103,52.521 ; P9.1@23.103,54.561 23.103,52.521 ; 116.61,50.989 158.577,50.989 161.146,53.559 v4(161.146,61.412) ; 116.613,50.979 23.103,50.979 23.103,52.521 ; v4@161.031,77.103 v4@161.031,90.311
  Bottom Layer w1: v4@161.015,61.527 v4@161.015,76.972 ; v4@161.088,90.121 v3@161.088,160.293
  other v3: 160.962,160.44
  other v4: 160.996,77.141 161.125,90.097
VDD_DIG_3V: J7.1 J13.6 J13.8 P6.1 | length 237.5
  Top Layer w0.2: J13.6@129.351,135.849 129.354,135.846 J13.6@129.376,135.824
  Top Layer w0.254: J13.8@128.851,135.849 128.851,134.795 129.129,134.516 ; 129.252,134.718 129.354,134.819 129.354,135.846 J13.6@129.354,135.901
  Top Layer w0.5: 129.129,134.516 132.643,131.002 132.643,127.928
  Top Layer w0.8: v6@132.643,75.856 132.643,127.928
  Top Layer w1: J7.1@11.515,109.317 16.254,109.317 21.792,103.778 ; P6.1@21.792,111.148 21.792,103.778 ; v4@132.569,60.921 45.117,60.921 22.303,83.735 22.303,103.268 21.792,103.778
  Top Layer w1.5: J7.1@11.469,109.27 J7.1@11.515,109.317
  Bottom Layer w0.8: v4@132.584,60.965 v6(132.584,75.664)
  other v4: 132.543,60.965
VDD_DIG_6V: J5.1 J13.1 J13.2 J13.4 P4.1 | length 371.5
  Top Layer w0.15: J13.1@130.345,141.48 J13.1@130.345,141.93
  Top Layer w0.2: J13.2@130.345,136.33 130.348,136.327 J13.2@130.37,136.305
  Top Layer w0.254: J13.4@129.845,136.33 129.845,135.276 130.123,134.997 ; 130.246,135.199 130.348,135.3 130.348,136.327 J13.2@130.348,136.382
  Top Layer w0.5: 110.229,140.098 117.584,147.453 126.453,147.453 130.487,143.42 130.487,141.935 ; 130.123,134.997 134.07,131.051 134.07,128.322
  Top Layer w0.8: v4(110.229,75.651) 110.229,140.098 ; 134.07,76.25 134.07,128.322
  Top Layer w1: J5.1@10.674,148.175 20.026,148.175 22.129,146.073 ; P4.1@23.462,149.167 23.212,148.918 23.212,147.156 22.129,146.073 ; v4@133.766,64.189 48.923,64.189 25.341,87.771 25.341,142.86 22.129,146.073
  Bottom Layer w0.8: v4@110.214,63.974 110.214,75.651 v4@110.214,75.717 ; v4@134.06,64.255 134.06,75.651 v6@134.06,75.717
  other v4: 110.27,64.263 134.054,64.3
  other v6: 134.075,75.651
VDD_IO_3P3V: J6.1 J13.13 J13.15 P5.1 | length 256.2
  Top Layer w0.15: J13.13@127.345,141.48 J13.13@127.372,141.508
  Top Layer w0.2: J13.15@126.845,141.48 126.845,142.79 126.847,142.792 126.847,143.206 126.845,143.208 126.845,143.734 127.092,143.98 127.372,143.699 J13.13@127.372,141.508
  Top Layer w0.5: 113.829,140.456 119.11,145.737 125.437,145.737 127.112,144.062
  Top Layer w0.8: v4(113.829,75.558) 113.829,140.456
  Top Layer w1: J6.1@10.674,128.764 17.914,128.764 20.302,126.376 ; P5.1@22.233,130.571 22.233,128.308 20.302,126.376 ; v4@113.683,62.692 47.157,62.692 24.191,85.658 24.191,122.487 20.302,126.376
  Bottom Layer w0.8: v4@113.903,62.55 v4@113.903,75.558
  other v4: 113.953,62.55
VDD_OTA: J9.1 J12.18 P8.1 | length 268.8
  Top Layer w0.1: v3@159.206,157.914 v3(159.246,157.954)
  Top Layer w0.25: J12.18@156.355,157.914 v3@159.206,157.914
  Top Layer w1: J9.1@10.674,71 10.702,71.028 18.662,71.028 31.242,58.448 ; P8.1@31.223,63.169 31.242,63.15 31.242,58.448 ; v4@159.267,63.253 159.267,53.985 157.905,52.623 37.067,52.623 31.242,58.448 ; v4@159.347,75.691 v4@159.347,88.754
  Bottom Layer w1: v4@159.253,88.451 159.253,88.568 v3@159.253,157.874 ; v4@159.307,63.061 v4@159.307,75.691
  other v4: 159.191,63.061 159.381,75.648 159.327,88.568
VDD_TAXEL_3V: J8.1 J13.22 P7.1 | length 214.2
  Top Layer w0.2: 125.088,130.069 125.345,130.326 J13.22@125.345,136.33 J13.22@125.345,136.456
  Top Layer w0.5: 23.109,78.659 23.429,78.979
  Top Layer w0.8: v6@125.131,75.696 125.131,129.816
  Top Layer w1: J8.1@11.003,90.135 12.273,90.135 23.429,78.979 47.924,54.483 v4@124.951,54.483 ; P7.1@23.109,75.099 23.109,78.659
  Bottom Layer w0.8: v4(125.036,54.759) 125.036,75.539 v6(125.081,75.584)
VDIV_1P5V: C37.1 J17.1 R33.1 R34.2 | length 7.5
  Bottom Layer w1.5: J17.1@337.388,145.225 343.719,145.225 ; 344.196,145.694 344.199,145.691 344.199,144.517
VIN_SINGLEEND_OTA: J24.2 R54.2 R63.1 | length 84.4
  Top Layer w0.2: R54.2@250.973,217.412 R63.1@250.973,220.321
  Top Layer w0.5: R63.1@250.833,220.461 v3(250.833,221.999)
  Layer 2 w0.5: J24.2@175.827,230.937 177.322,232.432 207.505,232.432 214.51,225.427 247.406,225.427 v3(250.833,221.999)
VIN_SINGLEEND_X0: J32.2 R71.2 R75.1 | length 91
  Top Layer w0.2: R71.2@306.164,176.586 R75.1@309.074,176.586
  Top Layer w0.5: R75.1@309.214,176.726 v3(310.751,176.726)
  Layer 2 w0.5: J32.2@260.492,230.246 260.492,229.743 269.22,221.014 269.22,197.422 278.611,188.031 299.446,188.031 v3(310.751,176.726)
VIN_SINGLEEND_Y0: J25.2 R55.2 R64.1 | length 87.2
  Top Layer w0.2: R55.2@234.856,168.828 R64.1@234.856,171.737
  Top Layer w0.5: R64.1@234.716,171.877 v3(234.716,173.415)
  Layer 1 w0.5: J25.2@196.515,231.242 212.126,231.242 234.716,208.652 v3(234.716,173.415)
VINN_COMP: C132.1 J12.6 P75.1 R80.1 | length 93.5
  Top Layer w0.15: C132.1@143.337,101.087 143.358,101.087 143.901,101.629 143.901,101.65 145.612,103.361 P75.1@145.612,104.894 145.612,115.121 137.99,122.742 137.99,156.675 147.817,166.502 157.041,166.502 158.651,164.892 158.651,161.565 158,160.914 J12.6@156.355,160.914
  Top Layer w0.2: R80.1@143.117,98.553 C132.1@143.117,101.062
VINN_COMP_PREFILT: P72.5 P75.2 R81.2 U69.3 | length 250.9
  Top Layer w0.2: P75.2@143.072,104.894 141.473,103.295 141.473,91.474 142.179,90.768 R81.2@143.321,90.768 ; U69.3@310.879,114.747 U69.3@310.936,114.805 ; U69.3@311.052,114.715 v2(312.78,114.715) 315.015,116.949 327.855,116.949 328.507,116.296 330.657,116.296 P72.5@331.907,115.046
  Layer 1 w0.2: P75.2@143.072,104.894 143.072,95.153 158.736,79.489 296.755,79.489 307.775,90.51 307.775,110.081 310.021,112.326 310.392,112.326 v2(312.78,114.715)
VINN_OTA: J12.16 P55.2 | length 138.4
  Top Layer w0.15: J12.16@156.355,158.415 156.42,158.479 163.162,158.479 166.665,161.983 166.665,183.8 172.182,189.317 205.272,189.317 214.897,179.692 242.508,179.692 P55.2@258.545,195.729
VINN_X0: J11.20 P17.1 U14.3 | length 137.2
  Top Layer w0.15: J11.20@125.845,165.649 125.892,165.602 125.892,163.151 v3(125.939,163.105) ; v3(125.939,160.184) 136.733,160.184 153.918,177.37 153.918,187.158 159.886,193.125 188.722,193.125 192.508,196.911 192.508,218.374 191.803,219.079 187.736,219.079 P17.1@187.471,218.813 ; U14.3@172.449,220.25 172.601,220.25 172.704,220.148 172.704,218.987 173.406,218.284 186.225,218.284 187.113,219.172 P17.1@187.647,219.706
  Bottom Layer w0.15: v3(125.939,160.184) v3(125.939,163.105) v3@125.957,163.105
VINN_X0_0: P69.2 P71.1 R72.2 | length 73
  Top Layer w0.2: P71.1@274.548,172.647 277.531,169.663 280.484,169.663 ; P69.2@282.65,169.663 280.484,169.663 ; R72.2@321.883,208.396 321.769,208.281 321.769,204.908 317.908,201.047 308.94,192.079 298.515,192.079 284.124,177.687 281.347,177.687 280.484,176.824 280.484,169.663
VINN_X0_2: J12.21 U7.3 | length 116.7
  Top Layer w0.15: J12.21@151.134,156.907 147.003,156.907 143.972,153.875 143.972,126.284 148.143,122.112 173.316,122.112 176.281,125.078 176.281,144.991 181.698,150.408 187.058,150.408 189.005,148.461 189.005,146.031 187.591,144.617 184.494,144.617 183.958,145.153 U7.3@183.958,146.619
VINN_X0_3: J12.28 U27.3 | length 168.7
  Top Layer w0.15: J12.28@156.843,155.36 162.966,155.36 168.51,160.905 168.51,183.634 172.691,187.815 204.65,187.815 212.297,180.168 212.297,152.766 212.297,124.879 213.315,123.862 229.181,123.862 229.209,123.89 230.77,122.329 230.77,118.404 229.805,117.44 229.008,117.44 228.211,118.237 228.211,119.344 U27.3@228.058,119.344
VINN_X1: J11.39 P18.1 U15.3 | length 121
  Top Layer w0.15: U15.3@74.34,185.749 74.34,186.148 73.653,186.834 63.684,186.834 63.142,186.292 P18.1@63.142,182.47 59.348,182.47 57.119,180.241 57.119,158.153 60.237,155.036 89.005,155.036 108.36,174.391 119.801,174.391 119.801,174.399 120.845,173.356 J11.39@120.846,170.799
VINN_Y0: J11.32 P24.1 U28.3 | length 70.7
  Top Layer w0.15: P24.1@64.07,148.091 64.07,151.913 64.416,152.26 74.776,152.26 ; U28.3@75.268,151.37 75.268,151.769 74.776,152.26 ; v3(120.4,163.511) 120.097,163.511 108.847,152.26 74.776,152.26 ; v3(122.816,163.514) 122.915,163.613 122.845,163.682 122.845,163.878 122.788,163.936 122.788,164.37 122.845,164.428 J11.32@122.845,165.649
  Bottom Layer w0.15: v3(120.4,163.511) 120.401,163.512 122.815,163.512 v3(122.816,163.514)
VINN_Y0_0: P57.2 P59.1 R56.2 | length 90.6
  Top Layer w0.2: P59.1@240.146,139.784 242.575,142.212 P57.2@242.575,147.866 ; P57.2@242.434,147.726 P57.2@242.575,147.866 ; R56.2@292.987,208.336 292.873,208.222 292.873,204.336 257.212,168.676 257.212,162.504 P57.2@242.575,147.866
VINN_Y0_1: J11.6 U3.3 | length 87.3
  Top Layer w0.15: J11.6@129.345,165.649 129.345,164.698 130.167,163.876 134.556,163.876 137.439,166.759 137.439,189.477 v3@137.243,189.673 ; U3.3@132.982,226.545 132.982,226.943 132.49,227.435 128.468,227.435 124.299,223.266 121.784,220.75 121.784,203.013 134.725,190.072 v3(134.725,189.555)
  Bottom Layer w0.15: v3@134.725,189.549 v3(137.325,189.549)
VINN_Y0_2: J12.7 U13.3 | length 122.4
  Top Layer w0.1: 178.247,89.483 178.676,89.054 181.971,89.054 184.713,91.796 v3(184.713,97.186)
  Top Layer w0.15: v3(145.972,159.321) 141.145,154.494 141.145,125.075 146.171,120.049 180.621,120.049 v3@184.755,115.915 ; v3@146.595,160.429 J12.7@151.56,160.429 ; 178.247,89.483 U13.3@178.247,89.882
  Top Layer w0.2: J12.7@151.205,160.415 151.227,160.392 J12.7@151.24,160.392
  Layer 1 w0.1: v3(184.689,115.946) 184.701,115.934 184.701,97.198 v3(184.713,97.186)
  Bottom Layer w0.15: v3@146.001,159.463 146.001,159.846 v3(146.595,160.441) 146.595,160.418 v3@146.735,160.279
VINN_Y0_3: J12.31 U31.3 | length 174
  Top Layer w0.15: J12.31@151.205,154.414 146.758,154.414 145.861,153.518 145.861,126.754 148.556,124.059 172.155,124.059 174.788,126.692 174.788,181.061 179.118,185.392 189.626,185.392 v3@193.743,181.275 ; U31.3@187.144,155.755 187.144,155.357 187.636,154.865 v3@193.811,154.865
  Layer 1 w0.1: v3(193.783,181.153) 193.797,181.139 193.797,154.916 v3(193.811,154.902)
VINN_Y1: J11.25 P11.1 U2.3 | length 114
  Top Layer w0.15: P11.1@62.893,215.748 62.893,219.571 ; U2.3@74.091,219.027 74.091,219.426 73.404,220.112 63.435,220.112 62.893,219.571 ; v3(124.247,174.406) 124.401,174.252 124.401,170.885 124.33,170.814 J11.25@124.346,170.799 ; v3(124.76,178.438) 122.267,180.93 118.96,180.93 111.782,188.108 111.782,203.25 93.573,221.459 63.381,221.459 62.893,220.972 62.893,219.571
  Bottom Layer w0.15: v3(124.247,174.406) 124.293,174.453 124.293,177.972 v3(124.76,178.438)
VINP_COMP: C130.1 J12.4 P74.1 R78.1 | length 92.8
  Top Layer w0.15: C130.1@151.038,101.171 150.94,101.171 148.76,103.351 148.76,104.917 P74.1@148.771,104.928 148.771,112.446 138.24,122.976 138.24,156.501 147.818,166.079 156.922,166.079 158.306,164.694 158.306,161.834 157.887,161.415 J12.4@156.355,161.415 ; R78.1@151.108,98.593 C130.1@151.108,101.102
VINP_COMP_PREFILT: P72.7 P74.2 R79.2 U69.2 | length 246.1
  Top Layer w0.2: R79.2@151.136,90.714 151.917,90.714 152.742,91.54 152.742,103.385 151.311,104.817 P74.2@151.311,104.928 ; U69.2@310.879,115.397 310.912,115.431 311.999,115.431 v2(312.75,116.183) 314.154,117.586 327.799,117.586 328.841,118.628 330.865,118.628 P72.7@331.907,117.586
  Layer 1 w0.2: P74.2@151.311,104.928 151.311,88.88 160.241,79.949 295.552,79.949 307.15,91.547 307.15,110.583 v2(312.75,116.183)
VINP_OTA: J12.14 P54.2 | length 128.4
  Top Layer w0.15: J12.14@156.355,158.914 163.021,158.914 166.415,162.309 166.415,183.922 172.065,189.572 205.417,189.572 214.546,180.442 234.43,180.442 248.667,194.679
  Top Layer w0.2: 248.667,194.679 P54.2@248.667,195.729